# Altium PCB 0084 - AR Display Board Rev2.1.PcbDoc (part 1 of 3)
Units mm, origin at the board's own origin, x right, y up, seen from the top; angles counter-clockwise.
Board outline 127.7 x 27.2 mm, 4 copper layers (L1-TOP, L2-GND, L3-GND, L4-BOT), stack 1.571 mm thick; 141 components, 141 nets, 671 pads, 447 vias.
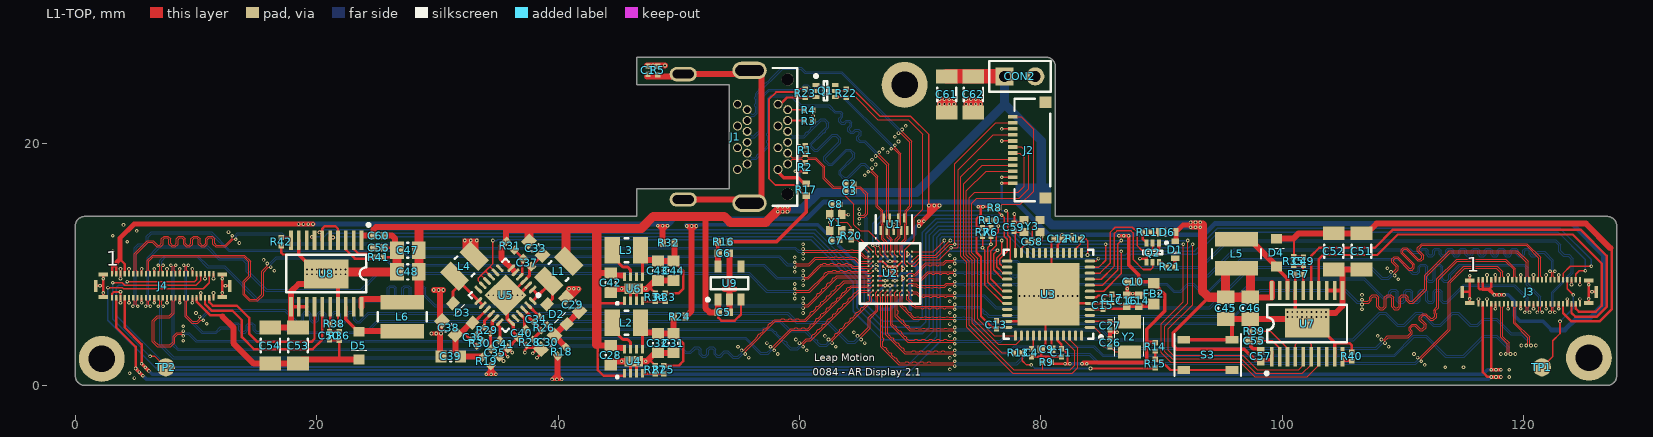
[diagram p0: L1-TOP view]
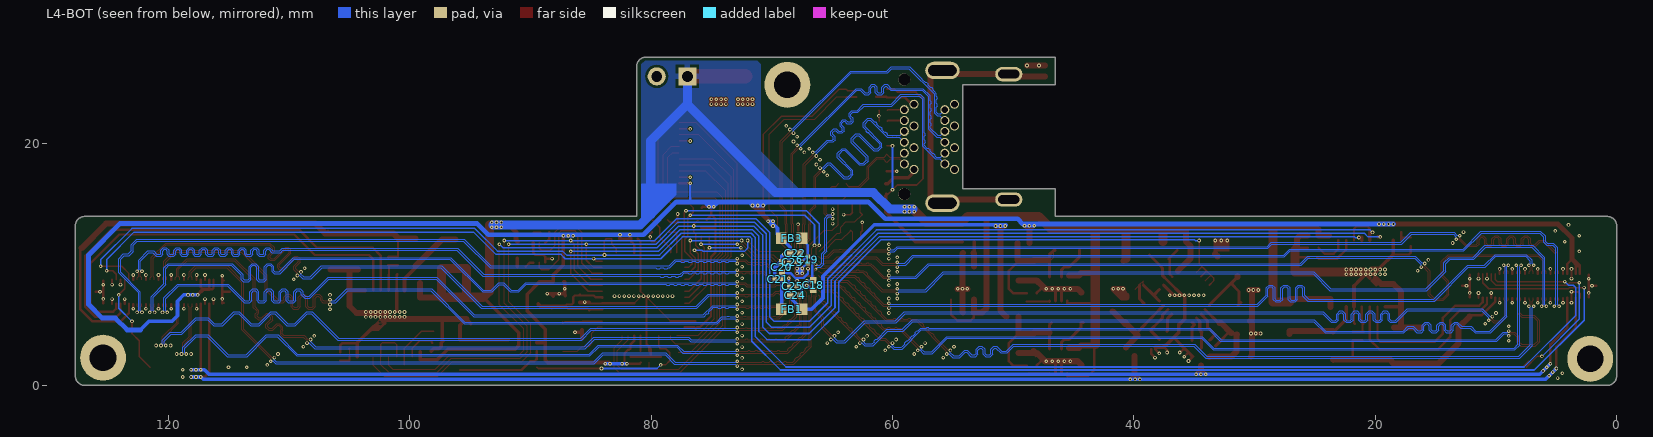
[diagram p1: L4-BOT view, seen from below]
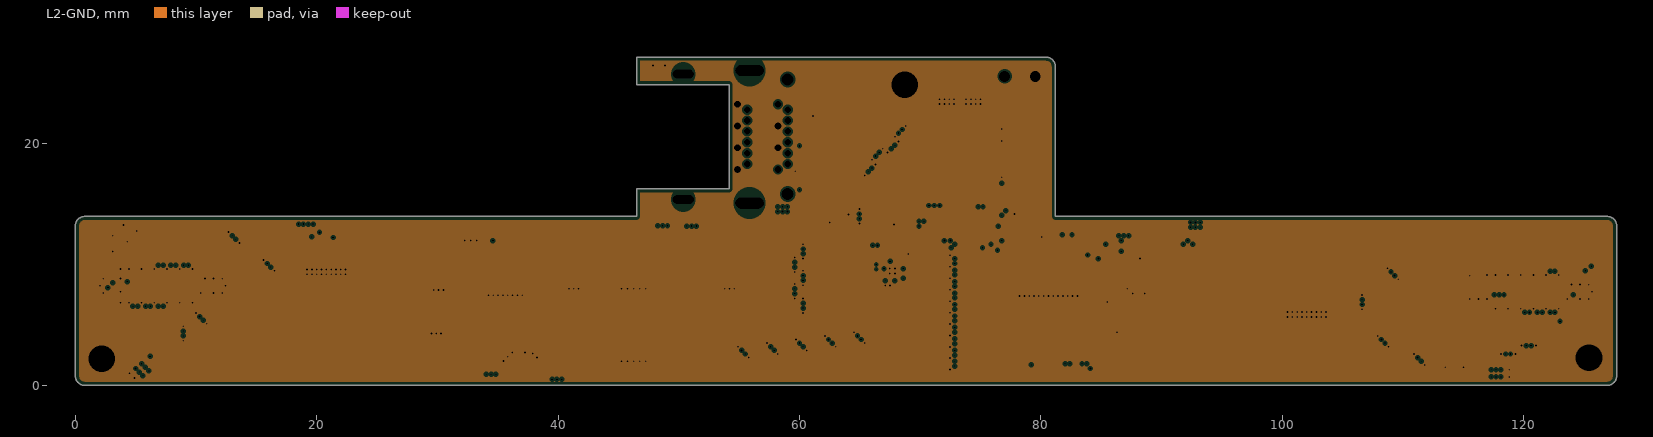
[diagram p2: L2-GND, clearances drawn from the general rule]
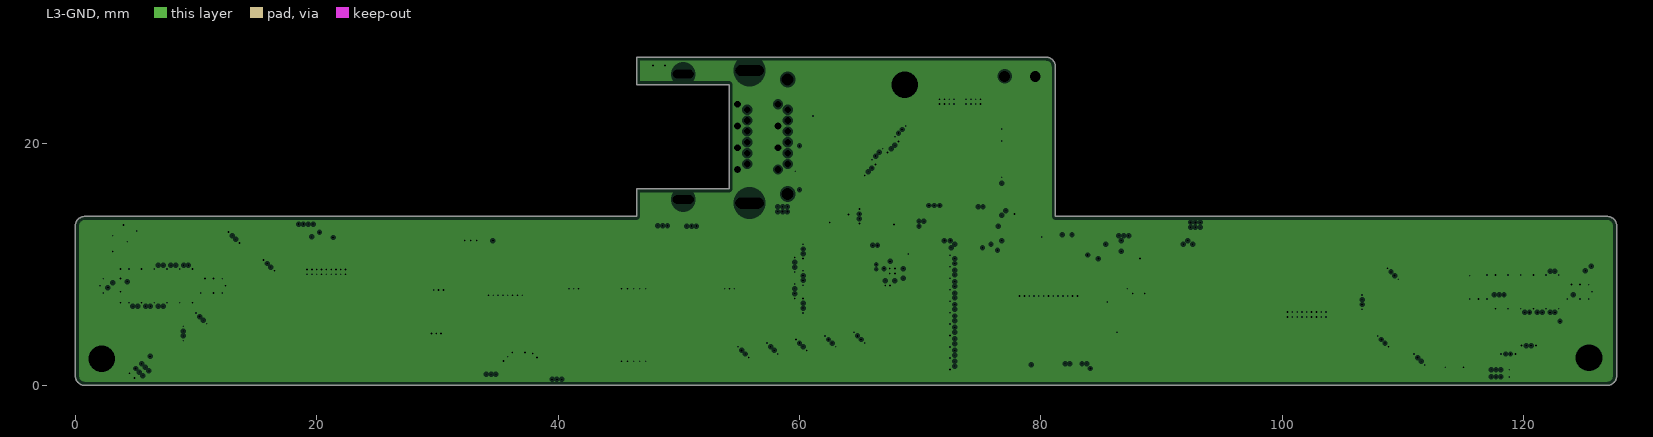
[diagram p3: L3-GND, clearances drawn from the general rule]

## Layer stack, top to bottom
Top Solder: solder mask 0.0102, Solder Resist, Dk 3.5
L1-TOP: signal copper 0.035
Dielectric1: core 0.175, FR-4, Dk 4.2
L2-GND: plane copper 0.036, net GND
Dielectric2: prepreg 1, Dk 4.2
L3-GND: plane copper 0.036, net GND
Dielectric 3: core 0.254, Dk 4.2
L4-BOT: signal copper 0.035
Bottom Solder: solder mask 0.0102, Solder Resist, Dk 3.5

## Board outline
0.8,0 cw(c0.8,0.8) 0,0.8 0,13.2 cw(c0.8,13.2) 0.8,14 46.5,14 46.5,16.3 54.16,16.3 54.16,24.9 46.5,24.9 46.5,27.2 80.4,27.2 cw(c80.4,26.4) 81.2,26.4 81.2,14 126.9,14 cw(c126.9,13.2) 127.7,13.2 127.7,0.8 cw(c126.9,0.8) 126.9,0

## Design rules (kind name [scope] priority, off if disabled: settings)
Clearance Clearance_1 [InComponent('CON2')] p1: gap=0.2
Clearance dp [(InDifferentialPairClass('All Differential Pairs')) vs InNet('GND')] p2: gap=0.076
Clearance [All] p3: gap=0.076
DiffPairsRouting [All] p1: maxlimit=0.076 minlimit=0.076 mostfreqgap=0.076 toplayer_minwidth=0.076 toplayer_maxwidth=0.076 toplayer_prefwidth=0.076 bottomlayer_minwidth=0.076 bottomlayer_maxwidth=0.076 bottomlayer_prefwidth=0.076 maxuncoupledlength=12.7
HoleSize [All] p1: absolutevalues=TRUE maxlimit=2.54 minlimit=0.1 maxpercent=80.000 minpercent=20.000
HoleToHoleClearance [All] p1: gap=0.25 allowstackedmicrovias=TRUE
MatchedLengths ML_MIPI_R [InNetClass('MIPI_R')] p1: tolerance=0.025 checknetsindiffpair=TRUE checkdiffpairvsdiffpair=TRUE checkothers=TRUE
MatchedLengths ML_MIPI_L [InNetClass('MIPI_L')] p2: tolerance=0.025 checknetsindiffpair=TRUE checkdiffpairvsdiffpair=TRUE checkothers=TRUE
MatchedLengths ML_DP_LANE [InNetClass('DP_LANE')] p3: tolerance=0.025 checknetsindiffpair=TRUE checkdiffpairvsdiffpair=TRUE checkothers=TRUE
MinimumAnnularRing [All] p1: minimumring=0.074
MinimumSolderMaskSliver [All] p1: minsoldermaskwidth=0.076
PlaneClearance [All] p1: clearance=0.15
PlaneConnect [All] p1: planeconnectstyle=Direct reliefexpansion=0 reliefentries=4 reliefconductorwidth=0.15 reliefairgap=0.15
PolygonConnect PolygonConnect_2 [InNet('GND') And OnLayer('L4-BOT')] p1: connectstyle=Relief reliefconductorwidth=0.254 reliefentries=4 polygonreliefangle="90 Angle" airgapwidth=0.254
PolygonConnect PolygonConnect_1 [InNet('5V') And OnLayer('L4-BOT')] p2: connectstyle=Relief reliefconductorwidth=0.5 reliefentries=4 polygonreliefangle="90 Angle" airgapwidth=0.2
PolygonConnect [All] p3: connectstyle=Direct reliefconductorwidth=0.254 reliefentries=4 polygonreliefangle="90 Angle" airgapwidth=0.254
RoutingVias [All] p1: holewidth=0.15 width=0.3 viastyle="Through Hole" minholewidth=0.15 minwidth=0.3 maxholewidth=0.711 maxwidth=1.27
SilkToSilkClearance [All] p1: silktosilkclearance=0.2
SilkToSolderMaskClearance SilkscreenOverComponentPads [IsPad] p1: minsilkscreentomaskgap=0.1 clearancetoexposedcopper=FALSE
SolderMaskExpansion [All] p1: expansion=0.025
UnpouredPolygon [All] p1: allowunpoured=FALSE
Width [All] p1: maxlimit=5 minlimit=0.076 preferedwidth=0.2 minimp=50.000000 maximp=50.000000 favimp=50.000000
21 further rules are at their usual default settings.

## Classes and differential pairs
component class "0084 - Connectors": C1 C61 C62 CON2 J1 J2 J3 J4 R1 R2 R3 R4 R5 R17 TP1 TP2 U1
component class "0084 - MCU": C2 C3 C4 C7 C8 C9 C10 C11 C12 C13 C14 C15 C16 C17 C18 C19 C20 C21 C22 C23 C24 C25 C26 C27 C58 C59 D1 D6 FB1 FB2 FB3 Q1 Q2 R6 R7 R8 R9 R10 R11 R12 R13 R14 R15 R20 R21 R22 R23 S3 U2 U3 Y1 Y2 Y3
component class "0084 - Power": C5 C6 C28 C29 C30 C31 C32 C33 C34 C35 C36 C37 C38 C39 C40 C41 C42 C43 C44 C45 C46 C47 C48 C49 C50 C51 C52 C53 C54 C55 C56 C57 C60 D2 D3 D4 D5 L1 L2 L3 L4 L5 L6 R16 R18 R19 R24 R25 R26 R27 R28 R29 R30 R31 R32 R33 R34 R35 R36 R37 R38 R39 R40 R41 R42 U4 U5 U6 U7 U8 U9
net class MIPI_R: MIPI_DSI10_0_N MIPI_DSI10_0_P MIPI_DSI10_1_N MIPI_DSI10_1_P MIPI_DSI10_2_N MIPI_DSI10_2_P MIPI_DSI10_3_N MIPI_DSI10_3_P MIPI_DSI10_C_N MIPI_DSI10_C_P MIPI_DSI11_0_N MIPI_DSI11_0_P MIPI_DSI11_1_N MIPI_DSI11_1_P MIPI_DSI11_2_N MIPI_DSI11_2_P MIPI_DSI11_3_N MIPI_DSI11_3_P MIPI_DSI11_C_N MIPI_DSI11_C_P
net class MIPI_L: MIPI_DSI00_0_N MIPI_DSI00_0_P MIPI_DSI00_1_N MIPI_DSI00_1_P MIPI_DSI00_2_N MIPI_DSI00_2_P MIPI_DSI00_3_N MIPI_DSI00_3_P MIPI_DSI00_C_N MIPI_DSI00_C_P MIPI_DSI01_0_N MIPI_DSI01_0_P MIPI_DSI01_1_N MIPI_DSI01_1_P MIPI_DSI01_2_N MIPI_DSI01_2_P MIPI_DSI01_3_N MIPI_DSI01_3_P MIPI_DSI01_C_N MIPI_DSI01_C_P
net class DP_LANE: DP_LANE0_N DP_LANE0_P DP_LANE1_N DP_LANE1_P DP_LANE2_N DP_LANE2_P DP_LANE3_N DP_LANE3_P
net class AUX: DP_AUX_CH_N DP_AUX_CH_P
differential pair AUX: +AUX_P -AUX_N
differential pair DP_AUX_CH: +DP_AUX_CH_P -DP_AUX_CH_N
differential pair DP_LANE0: +DP_LANE0_P -DP_LANE0_N
differential pair DP_LANE1: +DP_LANE1_P -DP_LANE1_N
differential pair DP_LANE2: +DP_LANE2_P -DP_LANE2_N
differential pair DP_LANE3: +DP_LANE3_P -DP_LANE3_N
differential pair MIPI_DSI00_0: +MIPI_DSI00_0_P -MIPI_DSI00_0_N
differential pair MIPI_DSI00_1: +MIPI_DSI00_1_P -MIPI_DSI00_1_N
differential pair MIPI_DSI00_2: +MIPI_DSI00_2_P -MIPI_DSI00_2_N
differential pair MIPI_DSI00_3: +MIPI_DSI00_3_P -MIPI_DSI00_3_N
differential pair MIPI_DSI00_C: +MIPI_DSI00_C_P -MIPI_DSI00_C_N
differential pair MIPI_DSI01_0: +MIPI_DSI01_0_P -MIPI_DSI01_0_N
differential pair MIPI_DSI01_1: +MIPI_DSI01_1_P -MIPI_DSI01_1_N
differential pair MIPI_DSI01_2: +MIPI_DSI01_2_P -MIPI_DSI01_2_N
differential pair MIPI_DSI01_3: +MIPI_DSI01_3_P -MIPI_DSI01_3_N
differential pair MIPI_DSI01_C: +MIPI_DSI01_C_P -MIPI_DSI01_C_N
differential pair MIPI_DSI10_0: +MIPI_DSI10_0_P -MIPI_DSI10_0_N
differential pair MIPI_DSI10_1: +MIPI_DSI10_1_P -MIPI_DSI10_1_N
differential pair MIPI_DSI10_2: +MIPI_DSI10_2_P -MIPI_DSI10_2_N
differential pair MIPI_DSI10_3: +MIPI_DSI10_3_P -MIPI_DSI10_3_N
differential pair MIPI_DSI10_C: +MIPI_DSI10_C_P -MIPI_DSI10_C_N
differential pair MIPI_DSI11_0: +MIPI_DSI11_0_P -MIPI_DSI11_0_N
differential pair MIPI_DSI11_1: +MIPI_DSI11_1_P -MIPI_DSI11_1_N
differential pair MIPI_DSI11_2: +MIPI_DSI11_2_P -MIPI_DSI11_2_N
differential pair MIPI_DSI11_3: +MIPI_DSI11_3_P -MIPI_DSI11_3_N
differential pair MIPI_DSI11_C: +MIPI_DSI11_C_P -MIPI_DSI11_C_N

## Components (designator, comment, footprint, x,y, rotation, side; value= is the part's Value field where it differs from the comment)
C1 "0.1uF" CAPC0201(0603)33_N 47.46,26.1 r270 top
C2 "0.1uF" CAPC0201(0603)33_N 64.16,16.7 r180 top
C3 "0.1uF" CAPC0201(0603)33_N 64.16,16.1 r180 top
C4 "0.1uF" CAPC0201(0603)33_N 79.2,2.7 r90 top
C5 "1.0uF" CAPC0402(1005)60_N 53.725,6.05 r0 top
C6 "1.0uF" CAPC0402(1005)60_N 53.725,10.95 r0 top
C7 "6pF" CAPC0201(0603)33_N 63,12 r180 top
C8 "6pF" CAPC0201(0603)33_N 63,15 r0 top
C9 "2.2uF" CAPC0402(1005)60_N 80.46,3 r180 top
C10 "1.0uF" CAPC0402(1005)60_N 87.66,8.6 r0 top
C11 "0.1uF" CAPC0201(0603)33_N 81.7,2.7 r90 top
C12 "0.1uF" CAPC0201(0603)33_N 81.425,12.15 r0 top
C13 "0.1uF" CAPC0201(0603)33_N 76.3,5.025 r270 top
C14 "1.0uF" CAPC0402(1005)60_N 88.1,7 r270 top
C15 "0.1uF" CAPC0201(0603)33_N 85.125,6.625 r270 top
C16 "1.0uF" CAPC0402(1005)60_N 87.1,7 r270 top
C17 "0.1uF" CAPC0201(0603)33_N 85.9,7.2 r90 top
C18 "1.0uF" CAPC0402(1005)60_L 66.56,8.3 r90 bottom
C19 "0.1uF" CAPC0201(0603)33_L 67.01,10.4 r90 bottom
C20 "1.0uF" CAPC0402(1005)60_L 69.16,9.8 r270 bottom
C21 "0.1uF" CAPC0201(0603)33_L 69.46,8.8 r180 bottom
C22 "1.0uF" CAPC0402(1005)60_L 68.06,10.95 r0 bottom
C23 "0.1uF" CAPC0201(0603)33_L 68.26,10.2 r0 bottom
C24 "1.0uF" CAPC0402(1005)60_L 68.06,7.45 r0 bottom
C25 "0.1uF" CAPC0201(0603)33_L 68.26,8.2 r0 bottom
C26 "18pF" CAPC0201(0603)33_N 85.725,3.55 r90 top
C27 "18pF" CAPC0201(0603)33_N 85.725,4.95 r270 top
C28 "10uF" CAPC0603(1608)100_N 44.36,2.5 r90 top
C29 "10uF" CAPC0603(1608)100_N 41.2,6.7 r315 top
C30 "10uF" CAPC0603(1608)100_N 39.144,3.567 r45 top
C31 "10uF" CAPC0603(1608)100_N 49.56,3.5 r90 top
C32 "10uF" CAPC0603(1608)100_N 48.26,3.5 r90 top
C33 "10uF" CAPC0603(1608)100_N 38.144,11.367 r135 top
C34 "15pF" CAPC0201(0603)33_N 38.19,5.487 r225 top
C35 "1.0uF" CAPC0402(1005)60_N 34.8,2.7 r315 top
C36 "12pF" CAPC0201(0603)33_N 33,4 r45 top
C37 "1.0uF" CAPC0402(1005)60_N 37.444,10.167 r135 top
C38 "10uF" CAPC0603(1608)100_N 30.944,4.767 r315 top
C39 "10uF" CAPC0603(1608)100_N 31.1,2.4 r0 top
C40 "10nF" CAPC0402(1005)60_N 37,4.3 r225 top
C41 "4.7nF" CAPC0402(1005)60_N 35.5,3.4 r315 top
C42 "10uF" CAPC0603(1608)100_N 44.36,8.5 r90 top
C43 "10uF" CAPC0603(1608)100_N 48.26,9.5 r90 top
C44 "10uF" CAPC0603(1608)100_N 49.56,9.5 r90 top
C45 "47uF" CAPC0805(2012)100_N 95.3,6.4 r90 top
C46 "47uF" CAPC0805(2012)100_N 97.35,6.4 r90 top
C47 "47uF" CAPC0805(2012)100_N 27.56,11.2 r0 top
C48 "47uF" CAPC0805(2012)100_N 27.56,9.4 r0 top
C49 "18pF" CAPC0201(0603)33_N 101.76,10.3 r270 top
C50 "18pF" CAPC0201(0603)33_N 21.06,4.1 r90 top
C51 "10uF" CAPC1206(3216)170_N 106.56,11.1 r90 top
C52 "10uF" CAPC1206(3216)170_N 104.26,11.1 r90 top
C53 "10uF" CAPC1206(3216)170_N 18.46,3.3 r270 top
C54 "10uF" CAPC1206(3216)170_N 16.16,3.3 r270 top
C55 "1.0uF" CAPC0402(1005)60_N 97.66,3.7 r180 top
C56 "1.0uF" CAPC0402(1005)60_N 25.16,11.4 r0 top
C57 "1.0uF" CAPC0402(1005)60_N 98.2,2.4 r270 top
C58 "12pF" CAPC0201(0603)33_N 79.26,11.9 r0 top
C59 "12pF" CAPC0201(0603)33_N 77.76,13.1 r90 top
C60 "1.0uF" CAPC0402(1005)60_N 25.16,12.4 r180 top
C61 "10uF" CAPC1206(3216)170_N 72.2,24.1 r90 top
C62 "10uF" CAPC1206(3216)170_N 74.4,24.1 r90 top
CON2 "CON2" CON2_100mil 78.26,25.6 r0 top
D1 "Value" Dialight_598-8010-107F 91.132,11.225 r270 top
D2 "SCHOTTKY" Toshiba_CUS10S40,H3F#1 39.9,5.9 r315 top
D3 "SCHOTTKY" Toshiba_CUS10S40,H3F#2 32.1,6 r315 top
D4 "SCHOTTKY" Toshiba_CUS10S40,H3F#2 99.5,11 r270 top
D5 "SCHOTTKY" Toshiba_CUS10S40,H3F#2 23.5,3.3 r90 top
D6 "Value" Dialight_598-8040-107F 90.475,12.7 r180 top
FB1 "Ferrite Bead" INDC1608X09N 68.36,6.3 r0 bottom
FB2 "Ferrite Bead" INDC1608X09N 89.36,7.6 r270 top
FB3 "Ferrite Bead" INDC1608X09N 68.36,12.2 r180 bottom
J1 "TE_2129320-3" TE_2129320-3 53.26,20.59 r270 top
J2 "FCI 10051922-1210ELF" "FCI 10051922-1210ELF" 79.51,19.5 r90 top locked
J3 "Kyocera_245863050024829" Kyocera_245863050024829 120.45,7.75 r0 top (schematic designator J2)
J4 "Kyocera_245863050024829" Kyocera_245863050024829 7.25,8.25 r0 top (schematic designator J2)
L1 "4.7uH" INDC2520X10N 40.044,9.467 r225 top
L2 "1uH" INDC2520X10N 45.66,5.2 r0 top
L3 "1uH" INDC2520X10N 45.66,11.2 r0 top
L4 "4.7uH" INDC2520X10N 32.244,9.867 r45 top
L5 "15uH" Coilcraft_XAL4040-153MEB 96.2,10.9 r90 top
L6 "15uH" Coilcraft_XAL4040-153MEB 27.1,5.7 r270 top
Q1 "NFET_DUAL" SOT-563 62.16,24.4 r0 top
Q2 "NFET_DUAL" SOT-563 89.26,11 r270 top
R1 "1M" RESC0201(0603)_N#1 60.46,19.49 r90 top
R2 "1M" RESC0201(0603)_N#2 60.46,18.09 r270 top
R3 "1M" RESC0201(0603)_N#1 60.76,21.9 r180 top
R4 "1M" RESC0201(0603)_N#1 60.76,22.8 r180 top
R5 "1M" RESC0201(0603)_N#1 48.26,26.1 r270 top
R6 "4.7K" RESC0201(0603)_N#1 75.86,12.7 r90 top
R7 "4.7K" RESC0201(0603)_N#1 75.16,12.7 r90 top
R8 "10K" RESC0201(0603)_N#1 76.16,14.7 r180 top
R9 "10K" RESC0201(0603)_N#1 80.5,1.9 r0 top
R10 "10K" RESC0201(0603)_N#1 75.76,13.7 r180 top
R11 "1K" RESC0201(0603)_N#1 88.8,12.675 r180 top
R12 "10K" RESC0201(0603)_N#1 82.925,12.15 r180 top
R13 "1K" RESC0201(0603)_N#1 78.1,2.7 r0 top
R14 "10K" RESC0201(0603)_N#1 89.46,3.2 r90 top
R15 "1K" RESC0201(0603)_N#1 89.46,1.8 r270 top
R16 "0R" RESC0402(1005)_N 53.725,11.89 r0 top
R17 "0R" RESC0402(1005)_N 60.56,16.2 r270 top
R18 "0R" RESC0402(1005)_N 40.3,2.8 r225 top
R19 "0R" RESC0402(1005)_N 34.1,2 r315 top
R20 "1M" RESC0201(0603)_N#1 64.3,12.4 r270 top
R21 "1K" RESC0201(0603)_N#1 90.725,9.825 r180 top
R22 "10K" RESC0201(0603)_N#1 63.86,24.2 r90 top
R23 "10K" RESC0201(0603)_N#1 60.46,24.2 r270 top
R24 "0R" RESC0402(1005)_N 50.06,5.7 r0 top
R25 "36.5K" RESC0201(0603)_N#1 48.76,1.3 r90 top
R26 "560K" RESC0201(0603)_N#1 38.844,4.767 r225 top
R27 "30K" RESC0201(0603)_N#1 48.06,1.3 r270 top
R28 "150K" RESC0201(0603)_N#1 37.644,3.567 r45 top
R29 "715K" RESC0201(0603)_N#1 34.144,4.567 r135 top
R30 "620K" RESC0201(0603)_N#1 33.5,3.5 r45 top
R31 "10R" RESC0402(1005)_N 36.044,11.567 r315 top
R32 "0R" RESC0402(1005)_N 49.16,11.8 r180 top
R33 "90.9K" RESC0201(0603)_N#1 48.86,7.3 r90 top
R34 "30K" RESC0201(0603)_N#1 48.06,7.3 r270 top
R35 "750K" RESC0201(0603)_N#1 100.96,10.3 r270 top
R36 "750K" RESC0201(0603)_N#1 21.86,4.1 r90 top
R37 "130K" RESC0201(0603)_N#1 101.36,9.2 r0 top
R38 "130K" RESC0201(0603)_N#1 21.46,5.1 r180 top
R39 "49.9K" RESC0201(0603)_N#1 97.66,4.5 r0 top
R40 "62K" RESC0201(0603)_N#1 105.76,2.4 r270 top
R41 "49.9K" RESC0201(0603)_N#1 25.16,10.6 r180 top
R42 "62K" RESC0201(0603)_N#1 17.06,11.9 r90 top
S3 "SW-SPST" ALPS_SKRPABE010 93.825,2.525 r0 top
TP1 "TestPoint" TestPointRnd-1_5mm#1 121.5,1.5 r0 top
TP2 "TestPoint" TestPointRnd-1_5mm#2 7.9,1.5 r90 top
U1 "Semtech_RCLAMP7528T.TNT" Semtech_RCLAMP7528T.TNT 67.82,13.35 r90 top locked
U2 "Analogix_ANX7350" Analogix_ANX7350 67.5,9.275 r0 top
U3 "Atmel_ATSAMD21G18A-MU" Atmel_ATSAMD21G18A-MU 80.625,7.55 r0 top
U4 "TI_TLV62080" TI_TLV62080 46.26,2 r90 top
U5 "TI_TPS65131-Q1" TI_TPS65131-Q1 35.644,7.467 r225 top
U6 "TI_TLV62080" TI_TLV62080 46.26,8 r90 top
U7 "TI_TPS61194-Q1" TI_TPS61194-Q1 102.072,5.15 r0 top
U8 "TI_TPS61194-Q1" TI_TPS61194-Q1 20.775,9.231 r180 top
U9 "TI_LP5907_SOT23" TI_LP5907_SOT23 54.2,8.475 r90 top
Y1 "Crystal" Abracon_ABM11 63,13.5 r270 top
Y2 "Crystal_2pin" Abracon_ABS07 87.325,4.025 r270 top
Y3 "Crystal" Abracon_ABM11 79.26,13.2 r0 top

## Footprints (in the part's own frame and the unit in brackets; to place one, negate y for a bottom-side part, rotate by r counter-clockwise, add the part's x,y. Pads: shape width x height; smd on the part's side, far side on the other; paste and mask are expansions set on the pad)
Abracon_ABM11 [mm]
  rect 0.75x0.65 smd: 1(-0.65,-0.5) 2(0.65,-0.5) 3(0.65,0.5) 4(-0.65,0.5)
  body extent -1,-0.8 1,0.8, height 0.59
Abracon_ABS07 [mm]
  rect 1.1x1.9 smd: 0(-1.25,0) 1(1.25,0)
  silkscreen extent -1.6,-1.2 1.6,1.2, body extent -1.6,-0.75 1.6,0.75, height 0.9
ALPS_SKRPABE010 [mm]
  rect 1.05x0.65 smd: 1(-2,1.25) 1(2,1.25) 2(-2,-1.25) 2(2,-1.25)
  silkscreen extent -2.75,-1.75 2.75,1.75, body extent -2.3,-1.6 2.3,1.6, height 2.5
Analogix_ANX7350 [mm] "BGA, 100-Leads, Body 5.00x5.00mmx0.91mm, Pitch 0.40mm"
  round 0.171 smd: A1(-1.8,1.8) A2(-1.4,1.8) A3(-1,1.8) A4(-0.6,1.8) A5(-0.2,1.8) A6(0.2,1.8) A7(0.6,1.8) A8(1,1.8) A9(1.4,1.8) A10(1.8,1.8) B1(-1.8,1.4) B2(-1.4,1.4) B3(-1,1.4) B4(-0.6,1.4) B5(-0.2,1.4) B6(0.2,1.4) B7(0.6,1.4) B8(1,1.4) B9(1.4,1.4) B10(1.8,1.4) C1(-1.8,1) C2(-1.4,1) C3(-1,1) C4(-0.6,1) C5(-0.2,1) C6(0.2,1) C7(0.6,1) C8(1,1) C9(1.4,1) C10(1.8,1) D1(-1.8,0.6) D2(-1.4,0.6) D3(-1,0.6) D4(-0.6,0.6) D5(-0.2,0.6) D6(0.2,0.6) D7(0.6,0.6) D8(1,0.6) D9(1.4,0.6) D10(1.8,0.6) E1(-1.8,0.2) E2(-1.4,0.2) E3(-1,0.2) E4(-0.6,0.2) E5(-0.2,0.2) E6(0.2,0.2) E7(0.6,0.2) E8(1,0.2) E9(1.4,0.2) E10(1.8,0.2) F1(-1.8,-0.2) F2(-1.4,-0.2) F3(-1,-0.2) F4(-0.6,-0.2) F5(-0.2,-0.2) F6(0.2,-0.2) F7(0.6,-0.2) F8(1,-0.2) F9(1.4,-0.2) F10(1.8,-0.2) G1(-1.8,-0.6) G2(-1.4,-0.6) G3(-1,-0.6) G4(-0.6,-0.6) G5(-0.2,-0.6) G6(0.2,-0.6) G7(0.6,-0.6) G8(1,-0.6) G9(1.4,-0.6) G10(1.8,-0.6) H1(-1.8,-1) H2(-1.4,-1) H3(-1,-1) H4(-0.6,-1) H5(-0.2,-1) H6(0.2,-1) H7(0.6,-1) H8(1,-1) H9(1.4,-1) H10(1.8,-1) J1(-1.8,-1.4) J2(-1.4,-1.4) J3(-1,-1.4) J4(-0.6,-1.4) J5(-0.2,-1.4) J6(0.2,-1.4) J7(0.6,-1.4) J8(1,-1.4) J9(1.4,-1.4) J10(1.8,-1.4) K1(-1.8,-1.8) K2(-1.4,-1.8) K3(-1,-1.8) K4(-0.6,-1.8) K5(-0.2,-1.8) K6(0.2,-1.8) K7(0.6,-1.8) K8(1,-1.8) K9(1.4,-1.8) K10(1.8,-1.8)
  silkscreen extent -2.5,-2.5 2.5,2.5, body extent -2.5,-2.5 2.5,2.5, height 0.91
Atmel_ATSAMD21G18A-MU [mm]
  oval 0.85x0.25 smd: 1(3.425,-2.75) 2(3.425,-2.25) 3(3.425,-1.75) 4(3.425,-1.25) 5(3.425,-0.75) 6(3.425,-0.25) 7(3.425,0.25) 8(3.425,0.75) 9(3.425,1.25) 10(3.425,1.75) 11(3.425,2.25) 12(3.425,2.75) 25(-3.425,2.75) 26(-3.425,2.25) 27(-3.425,1.75) 28(-3.425,1.25) 29(-3.425,0.75) 30(-3.425,0.25) 31(-3.425,-0.25) 32(-3.425,-0.75) 33(-3.425,-1.25) 34(-3.425,-1.75) 35(-3.425,-2.25) 36(-3.425,-2.75)
  oval 0.25x0.85 smd: 13(2.75,3.425) 14(2.25,3.425) 15(1.75,3.425) 16(1.25,3.425) 17(0.75,3.425) 18(0.25,3.425) 19(-0.25,3.425) 20(-0.75,3.425) 21(-1.25,3.425) 22(-1.75,3.425) 23(-2.25,3.425) 24(-2.75,3.425) 37(-2.75,-3.425) 38(-2.25,-3.425) 39(-1.75,-3.425) 40(-1.25,-3.425) 41(-0.75,-3.425) 42(-0.25,-3.425) 43(0.25,-3.425) 44(0.75,-3.425) 45(1.25,-3.425) 46(1.75,-3.425) 47(2.25,-3.425) 48(2.75,-3.425)
  rect 5.15x5.15 smd: 49(0,0)
  silkscreen extent -3.7,-3.7 4.47,3.7, body extent -3.55,-3.55 3.55,3.55, height 0.9
CAPC0201(0603)33_L [mm] "Chip Capacitor, Body 0.6x0.3mm, Height 0.33mm, IPC High Density"
  rect 0.36x0.32 smd: 1(-0.28,0) 2(0.28,0)
  body extent -0.32,-0.17 0.32,0.17, height 0.33
CAPC0201(0603)33_N [mm] "Chip Capacitor, Body 0.6x0.3mm, Height 0.33mm, IPC Medium Density"
  rect 0.46x0.42 smd: 1(-0.33,0) 2(0.33,0)
  body extent -0.31,-0.16 0.32,0.17, height 0.33
CAPC0402(1005)60_L [mm] "Chip Capacitor, Body 1.0x0.5mm, Height 0.6mm, IPC High Density"
  rect 0.52x0.52 smd: 1(-0.4,0) 2(0.4,0)
  body extent -0.55,-0.3 0.55,0.3, height 0.6
CAPC0402(1005)60_N [mm] "Chip Capacitor, Body 1.0x0.5mm, Height 0.6mm, IPC Medium Density"
  rect 0.62x0.62 smd: 1(-0.45,0) 2(0.45,0)
  body extent -0.55,-0.3 0.55,0.3, height 0.6
CAPC0603(1608)100_N [mm] "Chip Capacitor, Body 1.6x0.8mm, Height 1.0mm, IPC Medium Density"
  rect 0.9x1 smd: 1(-0.8,0) 2(0.8,0)
  silkscreen extent -0.05,-0.4 0.05,0.4, body extent -0.87,-0.48 0.88,0.47, height 1
CAPC0805(2012)100_N [mm] "Chip Capacitor, Body 2.0x1.2mm, Height 1.0mm, IPC Medium Density"
  rect 1.15x1.45 smd: 1(-0.9,0) 2(0.9,0)
  silkscreen extent -0.05,-0.62 0.05,0.63, body extent -1.1,-0.72 1.1,0.73, height 1
CAPC1206(3216)170_N [mm] "Chip Capacitor, Body 3.2x1.6mm, Height 1.7mm, IPC Medium Density"
  rect 1.15x1.8 smd: 1(-1.5,0) 2(1.5,0)
  silkscreen extent -0.55,-0.8 0.55,0.8, body extent -1.7,-0.9 1.7,0.9, height 1.7
Coilcraft_XAL4040-153MEB [mm] "Chip Inductor, 2-Leads, Body 4.00x4.00mm, IPC Medium Density"
  rect 1.2x3.6 smd: 1(-1.2,0) 2(1.2,0)
  silkscreen extent -0.38,-2.03 0.38,2.03, body extent -2.1,-2.1 2.1,2.1, height 4.1
CON2_100mil [mm]
  rect 1.5x1.5 hole 0.9: 1(-1.27,0)
  round 1.5 hole 0.9: 2(1.27,0)
  silkscreen extent -2.54,-1.27 2.54,1.27
Dialight_598-8010-107F [mm]
  rect 0.45x0.65 smd: A(-0.7,0)
  rect 0.45x0.7 smd: K(0.7,0)
  body extent -0.81,-0.4 0.81,0.39, height 0.71
Dialight_598-8040-107F [mm]
  rect 0.45x0.65 smd: A(-0.7,0)
  rect 0.45x0.7 smd: K(0.7,0)
  body extent -0.81,-0.4 0.81,0.39, height 0.71
"FCI 10051922-1210ELF" [mm]
  rect 0.95x1 smd: 0(-3.975,-0.85) 0(3.975,-0.85)
  rect 0.3x0.8 smd: 1(-2.75,1.85) 2(-2.25,1.85) 3(-1.75,1.85) 4(-1.25,1.85) 5(-0.75,1.85) 6(-0.25,1.85) 7(0.25,1.85) 8(0.75,1.85) 9(1.25,1.85) 10(1.75,1.85) 11(2.25,1.85) 12(2.75,1.85)
  silkscreen extent -4.25,-1.25 4.25,1.7, body extent -4.25,-1.75 4.25,2, height 1.27
INDC1608X09N [mm] "Chip Inductor, 2-Leads, Body 1.60x0.80mm, IPC Medium Density"
  rect 0.89x0.96 smd: 1(-0.855,0) 2(0.855,0)
  body extent -0.87,-0.48 0.87,0.47, height 0.95
INDC2520X10N [mm] "Chip Inductor, 2-Leads, Body 2.50x2.00mm, IPC Medium Density"
  rect 1.27x2.2 smd: 1(-1.165,0) 2(1.165,0)
  silkscreen extent -0.15,-1 0.15,1, body extent -1.35,-1.1 1.35,1.1, height 1
Kyocera_245863050024829 [mm] "50 pin female connector 0.35mm pitch"
  rect 0.18x0.47 smd: 1(-4.2,-1) 2(-4.2,1) 3(-3.85,-1) 4(-3.85,1) 5(-3.5,-1) 6(-3.5,1) 7(-3.15,-1) 8(-3.15,1) 9(-2.8,-1) 10(-2.8,1) 11(-2.45,-1) 12(-2.45,1) 13(-2.1,-1) 14(-2.1,1) 15(-1.75,-1) 16(-1.75,1) 17(-1.4,-1) 18(-1.4,1) 19(-1.05,-1) 20(-1.05,1) 21(-0.7,-1) 22(-0.7,1) 23(-0.35,-1) 24(-0.35,1) 25(0,-1) 26(0,1) 27(0.35,-1) 28(0.35,1) 29(0.7,-1) 30(0.7,1) 31(1.05,-1) 32(1.05,1) 33(1.4,-1) 34(1.4,1) 35(1.75,-1) 36(1.75,1) 37(2.1,-1) 38(2.1,1) 39(2.45,-1) 40(2.45,1) 41(2.8,-1) 42(2.8,1) 43(3.15,-1) 44(3.15,1) 45(3.5,-1) 46(3.5,1) 47(3.85,-1) 48(3.85,1) 49(4.2,-1) 50(4.2,1)
  rect 0.3x1 smd: M(-5.55,0) M(5.55,0)
  rect 0.8x0.35 smd: M(-4.925,-0.935) M(-4.925,0.935) M(4.925,-0.935) M(4.925,0.935)
RESC0201(0603)_N#1 [mm] "Chip Resistor, Body 0.6x0.3mm, IPC Medium Density"
  rect 0.45x0.45 smd: 1(-0.35,0) 2(0.35,0)
  body extent -0.31,-0.16 0.31,0.16, height 0.3
RESC0201(0603)_N#2 [mm] "Chip Resistor, Body 0.6x0.3mm, IPC Medium Density"
  rect 0.45x0.45 smd: 1(0.35,0) 2(-0.35,0)
  body extent -0.31,-0.16 0.31,0.16, height 0.3
RESC0402(1005)_N [mm] "Chip Resistor, Body 1.0x0.5mm, IPC Medium Density"
  rect 0.55x0.65 smd: 1(-0.5,0) 2(0.5,0)
  body extent -0.52,-0.27 0.53,0.28, height 0.4
Semtech_RCLAMP7528T.TNT [mm] "SON, 10-Leads, Body 2.60x1.10mm, Pitch 0.50mm, IPC Medium Density"
  rect 0.75x0.2 smd mask+0: 1(-0.52,1.1) 2(-0.52,0.6) 3(-0.52,0) 4(-0.52,-0.6) 5(-0.52,-1.1) 6(0.52,-0.85) 7(0.52,-0.35) 8(0.52,0.35) 9(0.52,0.85)
  silkscreen extent -1.2,-1.5 0.75,1.55, body extent -0.6,-1.35 0.6,1.35, height 0.43
SOT-563 [mm] "SOTFL, 6-Leads, Body 1.60x1.60mm, Pitch 0.50mm, IPC Medium Density"
  rect 0.55x0.33 smd: 1(-0.8,0.5) 2(-0.8,0) 3(-0.8,-0.5) 4(0.8,-0.5) 5(0.8,0) 6(0.8,0.5)
  silkscreen extent -0.92,-0.8 0.15,1.35, body extent -0.6,-0.8 0.6,0.8, height 0.5
TE_2129320-3 [mm] "Mini Displayport"
  oval 1.45x2.85 hole 0.9 slot 2.35 at 90 deg: 0(-5.5,2.605) 0(5.49,2.605)
  oval 1.2x2.25 hole 0.7 slot 1.74 at 90 deg: 0(-5.2,-2.895) 0(5.19,-2.895)
  round 0.75 hole 0.55: 1(-2.7,1.605) 2(-2.7,4.955) 3(-2.25,2.405) 4(-2.25,5.755) 5(-1.35,2.405) 6(-1.35,5.755) 7(-0.9,1.605) 8(-0.9,4.955) 9(-0.45,2.405) 10(-0.45,5.755) 11(0.45,2.405) 12(0.45,5.755) 13(0.9,1.605) 14(0.9,4.955) 15(1.35,2.405) 16(1.35,5.755) 17(2.25,2.405) 18(2.25,5.755) 19(2.7,1.605) 20(2.7,4.955)
  round 1 hole 1 unplated: ""(-4.75,5.755) ""(4.74,5.755)
  silkscreen extent -5.7,4.5 5.7,6.56, body extent -5.67,-6.34 5.73,6.31, height 4.23
TestPointRnd-1_5mm#1 [mm]
  round 1.5 smd paste-1: 0(0,0)
TestPointRnd-1_5mm#2 [mm]
  round 1.5 smd paste-1: 0(0,0.4)
TI_LP5907_SOT23 [mm] "SOT23, 5-Leads, Body 2.90x2.80mm, Pitch 0.95mm, IPC Medium Density"
  rect 1x0.6 smd: 1(-1.375,0.95) 2(-1.375,0) 3(-1.375,-0.95) 4(1.375,-0.95) 5(1.375,0.95)
  silkscreen extent -1.5,-1.55 0.5,1.92, body extent -0.88,-1.52 0.87,1.53, height 1.45
TI_TLV62080 [mm] "SON, 8-Leads, Body 2.00x2.00mm, Pitch 0.50mm, Thermal Pad 1.55x0.85mm, IPC Medium Density"
  rect 0.7x0.25 smd: 1(-0.995,0.75) 2(-0.995,0.25) 3(-0.995,-0.25) 4(-0.995,-0.75) 5(0.995,-0.75) 6(0.995,-0.25) 7(0.995,0.25) 8(0.995,0.75)
  rect 0.85x1.55 smd: 9(0,0)
  silkscreen extent -1.4,1.26 -1.2,1.46, body extent -1.05,-1.05 1.05,1.05, height 0.8
TI_TPS61194-Q1 [mm] "20 TSSOP WITH P.PAD"
  rect 0.3x1.6 smd: 1(-2.943,-2.785) 2(-2.293,-2.785) 3(-1.643,-2.785) 4(-0.993,-2.785) 5(-0.343,-2.785) 6(0.307,-2.785) 7(0.957,-2.785) 8(1.607,-2.785) 9(2.257,-2.785) 10(2.907,-2.785) 11(2.907,2.715) 12(2.257,2.715) 13(1.607,2.715) 14(0.957,2.715) 15(0.307,2.715) 16(-0.343,2.715) 17(-0.993,2.715) 18(-1.643,2.715) 19(-2.293,2.715) 20(-2.943,2.715)
  rect 3.7x2.4 smd: 21(-0.022,0.009)
  silkscreen extent -3.5,-4.27 3.28,1.52, body extent -3.3,-1.52 3.3,1.52, height 1.1
TI_TPS65131-Q1 [mm]
  oval 0.8x0.25 smd: 1(-1.925,1.25) 2(-1.925,0.75) 3(-1.925,0.25) 4(-1.925,-0.25) 5(-1.925,-0.75) 6(-1.925,-1.25) 13(1.925,-1.25) 14(1.925,-0.75) 15(1.925,-0.25) 16(1.925,0.25) 17(1.925,0.75) 18(1.925,1.25)
  oval 0.25x0.8 smd: 7(-1.25,-1.925) 8(-0.75,-1.925) 9(-0.25,-1.925) 10(0.25,-1.925) 11(0.75,-1.925) 12(1.25,-1.925) 19(1.25,1.925) 20(0.75,1.925) 21(0.25,1.925) 22(-0.25,1.925) 23(-0.75,1.925) 24(-1.25,1.925)
  rect 2.45x2.45 smd: 25(0,0)
  silkscreen extent -2.15,-2.15 2.15,2.15, body extent -2,-2 2,2, height 1
Toshiba_CUS10S40,H3F#1 [mm] "SODFL, 2-Leads, Body 1.25x2.50mm, IPC Medium Density"
  rect 0.8x0.9 smd: A(-1.15,0) K(1.15,0)
  silkscreen extent 0.38,-0.64 0.38,0.64, body extent -0.9,-0.67 0.9,0.67, height 1
Toshiba_CUS10S40,H3F#2 [mm] "SODFL, 2-Leads, Body 1.25x2.50mm, IPC Medium Density"
  rect 0.8x0.9 smd: A(1.15,0) K(-1.15,0)
  silkscreen extent -0.38,-0.64 -0.38,0.63, body extent -0.9,-0.67 0.9,0.67, height 1

## Part data
C1 C2 C3 C4 C11 C12 C13 C15 C17 C19 C21 C23 C25: library part CAP_0060, "Capacitor, 0.1uF, 10V, 10%, 0201, Ceramic, X5R"
C5 C6 C10 C14 C16 C18 C20 C22 C24 C35 C37 C40 C41 C55 C56 C57 C60: library part CAP_0023, "Capacitor, 1.0uF, 10V, 10%, 0402, Ceramic, X5R"
C7 C8: library part CAP_0064, "Capacitor, 6pF, 50V, 0.1pF, 0201, Ceramic, C0G(NP0)"
C9: library part CAP_0016, "Capacitor, 2.2uF, 6.3V, 20%, 0402, Ceramic, X5R"
C26 C27 C49 C50: library part CAP_0066, "Capacitor, 18pF, 50V, 2%, 0201, Ceramic, C0G(NP0)"
C28 C29 C30 C31 C32 C33 C38 C39 C42 C43 C44: library part CAP_0069, "Capacitor, 10uF, 10V, 10%, 0603, Ceramic, X5R"
C34: library part CAP_0067, "Capacitor, 15pF, 50V, 2%, 0201, Ceramic, C0G(NP0)"
C36 C58 C59: library part CAP_0065, "Capacitor, 12pF, 50V, 2%, 0201, Ceramic, C0G(NP0)"
C45 C46 C47 C48: library part CAP_0050, "Capacitor, 47uF, 10V, 20%, 0805, Ceramic, X5R"
C51 C52 C53 C54 C61 C62: library part CAP_0068, "Capacitor, 10uF, 50V, 10%, 1206, Ceramic, X7R"
CON2: library part CONN_0036, "Connector, Generic, Header, 2POS, 2.54mm"
D1: library part LED_0017, "LED, 635nm, 140deg, , 20mA, , 1.6mm x 0.8mm, -30C - 85C"
D2 D3 D4 D5: library part DIODE_0020, "Diode, -40C - 150C, SOD-323"
D6: library part LED_0034, "LED, 593nm, 140deg, , 20mA, , 1.6mm x 0.8mm, -30C - 85C"
FB1 FB2 FB3: library part FB_0001, "FERRITE CHIP BEAD 600 OHM SMD"
J1: library part CONN_0094, "Connector, TE Connectivity, Receptacle, 20POS, 0.9mm"
J2: library part CONN_0043, "Connector, FCI, Right Angle, 12POS, 0.5mm"
J3 J4: "245863050024829"
L1 L4: library part IND_0023, "FIXED IND 4.7UH 1.4A 216 MOHM"
L2 L3: library part IND_0001, "INDUCTOR 1.0UH 20% 1600MA 1008"
L5 L6: library part IND_0026, "Fixed Inductors XAL4040 AEC-Q200 15 uH 20 % 2.8 A"
Q1 Q2: library part NFET_0009, "Transistor, NFET_DUAL, 2.2Ohm, 200mA, 120mW, 	SOT-563, -55C - 150C"
R1 R2 R3 R4 R5 R20: library part RES_0178, "Resistor, 1M, 1/20W, 1%, 0201"
R6 R7: library part RES_0040, "Resistor, 4.7K, 1/20W, 1%, 0201"
R8 R9 R10 R12 R14 R22 R23: library part RES_0014, "Resistor, 10K, 1/20W, 5%, 0201"
R11 R13 R15 R21: library part RES_0036, "Resistor, 1K, 1/20W, 5%, 0201"
R16 R17 R18 R19 R24 R32: library part RES_0006, "Resistor, 0R, 1/10W, Jumper, 0402"
R25: library part RES_0176, "Resistor, 36.5K, 1/20W, 1%, 0201"
R26: library part RES_0194, "Resistor, 560K, 1/20W, 1%, 0201"
R27 R34: library part RES_0175, "Resistor, 30K, 1/20W, 1%, 0201"
R28: library part RES_0173, "Resistor, 150K, 1/20W, 1%, 0201"
R29: library part RES_0195, "Resistor, 715K, 1/20W, 1%, 0201"
R30: library part RES_0174, "Resistor, 620K, 1/20W, 1%, 0201"
R31: library part RES_0094, "Resistor, 10R, 1/10W, 1%, 0402"
R33: library part RES_0177, "Resistor, 90.9K, 1/20W, 1%, 0201"
R35 R36: library part RES_0169, "Resistor, 750K, 1/20W, 1%, 0201"
R37 R38: library part RES_0170, "Resistor, 130K, 1/20W, 1%, 0201"
R39 R41: library part RES_0067, "Resistor, 49.9K, 1/20W, 1%, 0201"
R40 R42: library part RES_0071, "Resistor, 62K, 1/20W, 1%, 0201"
S3: library part SWT_0006, "Switch, SPST-NO, Button, 4.6mm x 3.2mm"
TP1 TP2: library part MISC_0052, "Misc, TestPoint"
U1: library part IC_0201, "TVS DIODE 5VWM 15VC SLP2611N9T"
U2: library part IC_0196, "DisplayPort 1.4-to-Dual MIPI Output Converter"
U3: library part IC_0197, "IC MCU 32BIT 256KB FLASH 48QFN"
U4 U6: library part IC_0195, "IC REG BUCK ADJ 1.2A SYNC 8WSON"
U5: library part IC_0199, "IC REG BCK BST INV ADJ DL 24VQFN"
U7 U8: library part IC_0200, "IC LED DRIVER 20TSSOP"
U9: library part IC_0118, "3.3 V LDO Voltage Regulators 250mA Ultra-Lo Noise LDO Reg"
Y1: library part XTAL_0025, "Crystal, 24MHz, 6pF, 4-SMD (2x1.6)"
Y2: library part XTAL_0023, "Crystal, 32.768KHz, 12.5pF, 2-SMD(3.2x1.5)"
Y3: library part XTAL_0024, "Crystal, 16MHz, 10pF, 4-SMD (2x1.6)"

## Free pads (board coordinates)
  round 3.8 hole 2.2: 0(2.2,2.2) 0(68.7,24.9) 0(125.4,2.3)

## Via types
v1: diameter 0.3, hole 0.15, L1-TOP to L4-BOT, tented both sides, 445 vias
v2: diameter 0.25, hole 0.1, L1-TOP to L4-BOT, tented both sides, 2 vias

## Nets (pads, with @x,y where several pads share a name; then routed paths per layer and width w, separated by ;. In a path a pad name is that pad's centre, name@x,y a point inside that pad or via, vN(x,y) a via of type N, cw(c..) or ccw(c..) an arc to the next point about the centre after c; other vN are vias at no path point)
1V: C24.2 C25.2 FB1.1 R24.2 U2.F8 U2.G8 | length 35.5
  L1-TOP w0.152: U2.G8@68.5,8.675 68.6,8.775 v1(68.6,8.875) 68.6,8.975 U2.F8@68.5,9.075 U2.G8@68.5,8.675
  L1-TOP w0.3: v1(50.66,13.2) 51.06,12.8 v1(51.46,13.2) v1(51.06,13.2) v1(50.66,13.2)
  L1-TOP w0.5: R24.2@50.56,5.7 51.06,6.2 51.06,12.8 51.06,13
  L4-BOT w0.2: C24.2@68.46,7.45 68.54,7.53 C25.2@68.54,8.2 68.6,8.26 v1(68.6,8.875)
  L4-BOT w0.3: 51.6,13.3 51.5,13.2 v1(51.46,13.2) v1(51.06,13.2) v1(50.66,13.2) 50.6,13.26 50.6,13.3 61.5,13.3 65.76,9.04 65.76,7.24 66.7,6.3 FB1.1@67.305,6.3 ; FB1.1@67.205,6.4 FB1.1@67.305,6.3 ; C24.2@68.46,7.45 68.46,7.255 FB1.1@67.505,6.3 FB1.1@67.305,6.3
1V8: C10.2 C11.2 C12.2 C13.2 C22.2 C23.2 FB2.1 FB3.1 J2.1 J3.2 J3.4 J3.8 J4.2 J4.4 J4.8 Q1.5 R6.2 R7.2 R8.2 R9.2 R10.2 R12.2 R14.2 R22.2 R32.2 U2.D8 U2.E8 U3.17 U3.36 U3.44 | length 239.6
  L1-TOP w0.127: Q1.5@62.96,24.4 63.71,24.4 R22.2@63.86,24.55 64.41,24.55 66.66,22.3 69.2,22.3 70.72,20.78 v1(70.72,14.9)
  L1-TOP w0.152: U2.E8@68.5,9.475 68.6,9.575 v1(68.6,9.675) 68.6,9.775 U2.D8@68.5,9.875 U2.E8@68.5,9.475
  L1-TOP w0.2: J4.2@3.05,9.25 3.05,9.95 3.225,10.125 3.4,9.95 J4.4@3.4,9.25 ; 3.7,10.45 4.1,10.05 J4.8@4.1,9.25 ; 75,14.8 75,14.14 ; v1@75.16,14.8 75.71,14.8 R8.2@75.81,14.7 ; R10.2@75.41,13.7 75,14.11 75,14.14 ; R6.2@75.86,13.05 R7.2@75.16,13.05 74.71,13.05 74.66,13.1 ; v1(76.75,16.75) J2.1@77.66,16.75 ; U3.36@77.2,4.8 76.405,4.8 C13.2@76.3,4.695 76.195,4.8 75.96,4.8 75.035,5.725 75.035,10.625 74.66,11 74.66,13.1 ; R9.2@80.85,1.9 80.95,1.8 v1(82,1.8) ; U3.44@81.375,4.125 81.375,3.725 81.7,3.4 C11.2@81.7,3.03 ; U3.17@81.375,10.975 81.375,11.65 81.625,11.9 81.625,12.12 C12.2@81.655,12.15 ; C12.2@81.655,12.18 C12.2@81.655,12.15 ; C11.2@81.845,2.955 81.895,2.955 82.16,2.69 82.2,2.65 82.2,1.8 ; R12.2@82.575,12.15 81.795,12.15 81.725,12.22 C12.2@81.655,12.15 ; J3.2@116.25,8.75 116.25,8.075 116.375,7.95 116.6,7.95 J3.4@116.6,8.75 ; 117.11,7.95 117.3,8.14 J3.8@117.3,8.75 ; 74.66,13.1 74.66,13.8 75,14.14
  L1-TOP w0.3: v1(74.8,14.8) 74.96,14.8 75,14.8 v1@75.16,14.8 ; C12.2@81.755,12.15 v1(81.755,12.475) ; v1(82,1.8) 82.2,1.8 v1(82.4,1.8) ; R12.2@82.575,12.15 v1(82.575,12.475) ; v1(86.46,12.4) v1(86.86,12.4) v1(87.26,12.4) 87.26,10 88.11,9.15 C10.2@88.11,8.6 89.215,8.6 FB2.1@89.36,8.455 90.26,7.555 90.26,6.16 88.76,4.66 88.76,3.6 ; R14.2@89.46,3.55 88.81,3.55 88.76,3.6 ; 116.6,7.95 117.11,7.95 v1(117.56,7.5) v1(117.96,7.5) v1(118.36,7.5) ; 48.66,12.825 v1(49.06,13.225) v1(48.66,13.225) ; 48.66,12.825 v1(48.66,13.225) ; 48.66,12.825 v1(48.26,13.225) v1(48.66,13.225) ; 70.1,13.6 v1(69.9,13.6) v1(69.9,13.2) v1(70.3,13.6) ; 70.1,13.6 v1(70.3,13.6) ; 70.1,13.6 70.72,14.22 ; v1(70.3,13.6) 70.8,14.1 ; 70.72,14.22 70.72,14.18 70.8,14.1 ; 70.72,14.22 v1(70.72,14.9) ; 70.72,14.22 71.06,14.56 ; v1(70.72,14.9) v1(71.16,14.9) ; v1(70.72,14.9) 70.96,14.66 ; 70.8,14.1 71.16,14.46 ; 70.96,14.66 v1@71.16,14.86 ; 70.96,14.66 71.06,14.56 ; 71.06,14.56 71.16,14.66 ; 71.06,14.56 71.16,14.46 ; 71.16,14.46 v1(71.6,14.9) v1(71.16,14.9) ; 71.16,14.46 71.16,14.66 ; 71.16,14.66 v1@71.16,14.86 ; v1@71.16,14.86 v1(71.16,14.9) ; v1@83.9,1.9 83.5,1.9 v1(83.4,1.8) v1(83.8,1.8) v1@83.9,1.9 ; v1@83.9,1.9 88.56,1.9 88.76,2.1 88.76,3.6
  L1-TOP w0.4: 3.225,9.975 3.7,10.45 3.7,12.2 4.865,13.365 v1(18.5,13.365) v1(18.9,13.365) v1(19.3,13.365) v1(19.7,13.365)
  L1-TOP w0.5: R32.2@48.66,11.8 48.66,12.825
  L4-BOT w0.2: C22.2@68.46,10.95 68.54,10.87 C23.2@68.54,10.2 68.6,10.14 v1(68.6,9.675) ; 76.75,15.25 v1(76.75,16.75)
  L4-BOT w0.3: 48.12,13.365 v1(48.26,13.225) v1(48.66,13.225) v1(49.06,13.225) 49.2,13.365 ; C22.2@68.46,10.95 68.46,11.445 FB3.1@69.215,12.2 69.525,12.51 69.525,13.025 69.9,13.4 ; 70.42,15.2 v1(70.72,14.9) v1(71.16,14.9) v1(71.6,14.9) 71.9,15.2 ; 74.4,15.2 v1(74.8,14.8) ; 75.2,15.2 v1(74.8,14.8) ; 75.6,15.2 v1(75.2,14.8) v1(74.8,14.8) ; v1(82,1.8) v1(82.4,1.8) v1(83.4,1.8) v1(83.8,1.8) ; v1(86.46,12.4) v1(86.86,12.4) v1(87.26,12.4) ; v1(117.56,7.5) v1(117.96,7.5) v1(118.36,7.5) 118.7,7.5 119.225,6.975 119.225,5.775 119.7,5.3 121.6,5.3 122.3,4.6 ; 69.9,13.4 v1(69.9,13.2) v1(70.3,13.6) v1(69.9,13.6) 69.9,13.4
  L4-BOT w0.4: v1(18.5,13.365) 48.12,13.365 49.2,13.365 49.635,13.8 60.6,13.8 62,15.2 70.42,15.2 71.9,15.2 74.4,15.2 75.2,15.2 75.6,15.2 77.9,15.2 80.625,12.475 v1(82.575,12.475) 93.475,12.475 94.4,13.4 124,13.4 126.6,10.8 126.6,6.7 125.475,5.575 124.375,5.575 123.4,4.6 122.3,4.6
1V8_ANA: C14.2 C15.2 C16.2 C17.2 FB2.2 U3.4 U3.6 | length 9.3
  L1-TOP w0.2: U3.4@84.05,6.3 85.045,6.3 85.125,6.22 85.255,6.35 86.875,6.35 C16.2@87.025,6.5 ; U3.6@84.05,7.274 U3.6@84.05,7.3 84.6,7.3 84.75,7.45 85.82,7.45 C17.2@85.9,7.53 85.98,7.45 86.325,7.45 86.45,7.325 86.45,6.825 86.575,6.7 C16.2@87,6.7
  L1-TOP w0.3: C16.2@87.1,6.55 C14.2@88.1,6.55 ; C14.2@88.225,6.425 C14.2@88.1,6.55 ; FB2.2@89.36,6.745 89.165,6.55 C14.2@88.1,6.55
1V8_AVDD: C18.2 C19.2 FB3.2 U2.C5 U2.C6 U2.C7 U2.G3 U2.G4 U2.G5 | length 6.8
  L1-TOP w0.152: U2.G3@66.5,8.675 U2.G4@66.9,8.675 U2.G5@67.3,8.675 ; U2.C5@67.3,10.275 U2.C6@67.7,10.275 U2.C7@68.1,10.275
  L4-BOT w0.2: v1(67.1,8.675) 66.585,8.675 C18.2@66.56,8.7 66.66,8.8 66.66,10.425 66.915,10.68 C19.2@67.01,10.68 ; v1(67.5,10.275) 67.095,10.68 C19.2@67.01,10.68 ; FB3.2@67.505,12.2 67.505,12.105 67.01,11.61 C19.2@67.01,10.68
1V8_BUCK: C43.2 C44.2 L3.2 R32.1 R33.2 U6.5 | length 11.8
  L1-TOP w0.1: L3.2@46.625,11.2 46.625,10.635 46.96,10.3 L3.2@47.01,10.3
  L1-TOP w0.2: R33.2@48.86,7.65 50.01,7.65 50.36,8 50.36,9.5 C44.2@49.56,10.3
  L1-TOP w0.25: L3.2@46.525,11.2 46.525,11.165 L3.2@46.56,11.2 ; L3.2@46.625,11.2 47.01,10.815 47.01,10.3 U6.5@47.01,8.995
  L1-TOP w0.3: C44.2@49.56,10.3 C44.2@49.66,10.4
  L1-TOP w0.5: L3.2@47.11,10.4 C43.2@48.26,10.4 ; C43.2@48.26,10.3 C44.2@49.56,10.3 ; C44.2@49.66,10.4 R32.1@49.66,11.8
1V_AVDD: C20.2 C21.2 FB1.2 U2.D4 U2.E4 U2.G6 U2.G7 | length 7.5
  L1-TOP w0.152: U2.G6@67.7,8.675 U2.G7@68.1,8.675 ; U2.E4@66.9,9.475 67,9.575 v1(67,9.675) 67,9.775 U2.D4@66.9,9.875 U2.E4@66.9,9.475
  L4-BOT w0.2: v1(67,9.675) 67,9.26 67.36,8.9 68.06,8.9 68.46,9.3 69.06,9.3 C20.2@69.16,9.4
  L4-BOT w0.3: v1(67.9,8.675) 67.9,8.84 67.91,8.85 ; C20.2@69.16,9.4 69.18,9.38 C21.2@69.18,8.8 69.18,6.335 FB1.2@69.215,6.3
1V_BUCK: C31.2 C32.2 L2.2 R24.1 R25.2 U4.5 | length 10.7
  L1-TOP w0.2: C32.2@48.36,4.4 C32.2@48.46,4.3 ; R25.2@48.86,1.65 50.01,1.65 50.36,2 50.36,3.5 C31.2@49.56,4.3
  L1-TOP w0.25: L2.2@46.825,5.2 47.01,5.015 47.01,4.4 U4.5@47.01,2.995
  L1-TOP w0.5: L2.2@47.01,4.4 48.26,4.4 C32.2@48.26,4.3 48.46,4.3 C31.2@49.56,4.3 R24.1@49.56,5.7
3V3: R1.2 R16.2 R17.2 R23.1 | length 26.5
  L1-TOP w0.127: v1(60,19.84) R1.2@60.46,19.84
  L1-TOP w0.15: R23.1@60.46,24.55 59.81,24.55 59.56,24.3 58.06,24.3 57.46,23.7 57.46,17.14 58,16.6 59.6,16.6 v1(60,16.2) 60.5,15.7 R17.2@60.56,15.7 ; R17.2@60.5,15.9 R17.2@60.56,15.9
  L1-TOP w0.3: R16.2@54.225,11.89 58.09,11.89 60.56,14.36 R17.2@60.56,15.7
  L4-BOT w0.15: v1(60,16.2) v1(60,19.84)
5V: C5.1 C28.2 C33.2 C42.2 C45.2 C46.2 C47.2 C48.2 C57.2 C60.2 C61.2 C62.2 CON2.1 D1.A D6.A L1.1 L5.1 L6.1 R31.1 U4.1 U4.8 U5.5 U5.6 U6.1 U6.8 U7.1 U7.20 U8.1 U8.20 U9.1 U9.3 | length 182.1
  L1-TOP w0.2: 43.06,6.8 45.51,6.8 U6.1@45.51,7.005 ; 43.3,3.3 43.3,1.26 43.76,0.8 45.51,0.8 U4.1@45.51,1.005 ; C5.1@53.275,6.05 53.275,5.6 53.525,5.35 54.625,5.35 55.15,5.875 U9.3@55.15,7.1
  L1-TOP w0.25: U4.1@45.51,0.785 U4.1@45.51,0.8 ; U6.1@45.51,6.785 U6.1@45.51,6.8
  L1-TOP w0.3: 93.9,7.3 90.96,4.36 90.96,3.3 91.26,3 96.85,3 97.725,2.125 99.129,2.125 U7.1@99.129,2.365 U7.1@99.129,2.8
  L1-TOP w0.4: D1.A@91.075,11.925 91.175,12.025 D6.A@91.175,12.7 91.775,13.3 92.5,13.3
  L1-TOP w0.5: U8.20@23.718,6.516 23.718,7.155 L6.1@27.1,7.155 ; U8.1@23.825,12.4 C60.2@24.71,12.4 24.71,12.91 24.925,13.125 28.332,13.125 ; 28.46,12.997 28.332,13.125 ; 35.632,13.125 28.332,13.125 ; 35.691,12.927 R31.1@35.691,11.92 35.325,11.554 35.325,10.508 36.355,9.478 ; 37.578,12.915 37.66,12.997 ; L1.1@40.65,10.508 L1.1@40.868,10.29 ; 43.2,3.4 43.3,3.3 C28.2@44.36,3.3 44.56,3.1 45.36,3.1 ; 43.2,9.3 C42.2@44.36,9.3 44.56,9.1 45.36,9.1 ; 52.36,14 52.2,13.84 52.2,6.4 52.55,6.05 C5.1@53.275,6.05 53.25,6.05 U9.1@53.25,7.1 ; C45.2@95.28,7.28 C45.2@95.3,7.3 ; C46.2@97.35,7.3 99.129,7.3 U7.20@99.129,8.5 ; 40.647,12.997 40.65,12.997 40.65,13 40.647,12.997
  L1-TOP w0.75: L6.1@27.1,6.9 28.46,6.9 C48.2@28.46,9.4 C47.2@28.46,11.2 28.46,12.997 ; 35.76,12.997 37.66,12.997 43.2,12.997 ; C33.2@37.578,11.932 37.578,12.915 ; L1.1@40.65,10.508 40.65,12.997 ; 43.2,3.4 43.2,9.3 43.2,12.997 ; 58.9,14.6 58.3,14.6 57.2,13.5 54.26,13.5 53.76,14 52.36,14 47.9,14 46.897,12.997 43.2,12.997 ; 92.5,13.3 93.4,13.3 93.4,7.8 93.9,7.3 C45.2@95.3,7.3 ; C45.2@95.3,7.3 C46.2@97.35,7.3 97.35,9.7 L5.1@96.2,9.7 95.3,9.7 C45.2@95.3,7.3
  L1-TOP w1.2: C61.2@72.2,25.6 C62.2@74.4,25.6 CON2.1@76.99,25.6
  L4-BOT w0.75: 58.3,14.6 60.2,14.6 61.575,15.975 69.675,15.975 76.99,23.29 ; CON2.1@76.99,25.6 76.99,23.29 ; 93.1,13.3 80.9,13.3 80.025,14.175 80.025,20.255 76.99,23.29
  other v1: 92.4,13.1 92.8,13.1 93.2,13.1 92.4,13.5 92.8,13.5 93.2,13.5 58.2,14.4 58.6,14.4 59,14.4 58.2,14.8 58.6,14.8 59,14.8
5V7: J3.3 J4.3 R18.2 | length 132.2
  L1-TOP w0.2: J4.3@3.4,7.25 3.4,4.8 5,3.2 v1(5,1.4) ; J3.3@116.6,6.75 116.6,1.1 117,0.7 v1(117.3,0.7)
  L1-TOP w0.3: v1(5,1.4) v1(5.3,1.1) v1(5.6,0.8) ; 39.854,0.854 v1(39.5,0.5) v1(39.9,0.5) v1(40.3,0.5) 39.946,0.854 39.925,0.875 ; v1@39.925,0.516 39.925,0.7 39.925,0.875 ; 39.946,0.894 39.925,0.916 39.925,0.875 ; v1(117.3,0.7) v1(117.7,0.7) v1(118.1,0.7)
  L1-TOP w0.5: 39.925,0.7 39.946,0.721 39.946,0.854 39.946,0.894 R18.2@39.946,2.446
  L4-BOT w0.3: v1(5,1.4) v1(5.3,1.1) 5.9,0.5 117.1,0.5 v1(117.3,0.7) v1(117.7,0.7) v1(118.1,0.7)
36V_BL_L: C49.1 C51.2 C52.2 D4.K J3.41 R35.1 | length 42.1
  L1-TOP w0.2: 100.96,12.06 R35.1@100.96,10.65 101.74,10.65 C49.1@101.76,10.63 ; C51.2@106.56,12.6 C51.2@106.76,12.8 ; J3.41@123.25,6.75 123.25,6.01 123.96,5.3 126.26,5.3 127.3,6.34 127.3,11.26 127.18,11.38
  L1-TOP w0.5: D4.K@99.5,12.15 100.9,12.15 101.35,12.6 C52.2@104.26,12.6 C51.2@106.56,12.6 107,12.6 107.8,13.4 125.15,13.4 127.175,11.375
36V_BL_R: C50.1 C53.2 C54.2 D5.K J4.41 R36.1 | length 19.3
  L1-TOP w0.2: J4.41@10.05,7.25 10.05,6.95 11.2,5.8 12.1,5.8 12.2,5.7 ; C50.1@21.06,3.75 R36.1@21.86,3.75 21.86,2.15 21.9,2.15 ; D5.K@23.5,1.95 D5.K@23.5,2
  L1-TOP w0.5: 12.2,5.7 13.1,4.8 13.1,3.5 14.8,1.8 C54.2@16.16,1.8 C53.2@18.46,1.8 18.81,2.15 21.86,2.15 D5.K@23.5,2.15
-5V7: J3.7 J4.7 R19.2 | length 129.1
  L1-TOP w0.2: J4.7@4.1,7.25 4.1,4.8 5.5,3.4 v1(5.5,1.8) ; v1(117.3,1.3) J3.7@117.3,6.75
  L1-TOP w0.3: v1(5.5,1.8) v1(6.1,1.2) ; v1(117.3,1.3) v1(117.7,1.3) v1(118.1,1.3) ; v1(34.45,0.925) 34.45,1.1 R19.2@34.45,1.325 ; v1(34.45,0.925) v1(34.85,0.925) 34.454,1.321 34.454,1.329 R19.2@34.45,1.325 ; v1(34.45,0.925) v1(34.05,0.925) R19.2@34.45,1.325
  L1-TOP w0.5: 34.45,1.1 34.454,1.104 R19.2@34.454,1.321 ; R19.2@34.454,1.329 R19.2@34.454,1.646
  L4-BOT w0.3: v1(5.5,1.8) 6.375,0.925 116.625,0.925 117,1.3 v1(117.7,1.3) v1(118.1,1.3)
  other v1: 5.8,1.5
ANX_HPD: Q1.4 R22.1 U2.D9 | length 20.2
  L1-TOP w0.076: R22.1@63.86,23.85 64.65,23.85 66.5,22 69,22 70.2,20.8 70.2,14.6 69.5,13.9 69.5,12.04 68.7,11.24 68.7,10.075 U2.D9@68.9,9.875
  L1-TOP w0.152: Q1.4@62.96,23.9 63.81,23.9 R22.1@63.86,23.85
ANX_I2C_SCL: J2.9 R7.1 U2.D10 U3.32 | length 25.8
  L1-TOP w0.076: U2.D10@69.3,9.875 69.575,9.875 70.1,10.4 71.56,10.4 v1(72.56,11.4)
  L1-TOP w0.1: v1(72.56,11.4) 73.06,11.4 73.16,11.5 73.16,17.86 76.05,20.75 J2.9@77.66,20.75
  L1-TOP w0.125: R7.1@75.16,12.35 v1(75.16,11.4) 75.335,11.225 75.335,8.325 76.86,6.8 U3.32@77.2,6.8
  L4-BOT w0.125: v1(72.56,11.4) v1(75.16,11.4)
ANX_I2C_SDA: J2.11 R6.1 U2.C9 U3.31 | length 26.6
  L1-TOP w0.076: U2.C9@68.9,10.275 69.1,10.075 69.475,10.075 70,10.6 71.36,10.6 72.46,11.7 v1(72.86,11.7)
  L1-TOP w0.1: v1(72.86,11.7) 72.86,18.36 76.25,21.75 J2.11@77.66,21.75
  L1-TOP w0.125: R6.1@75.86,12.35 v1(75.86,11.7) 75.585,11.425 75.585,8.575 76.86,7.3 U3.31@77.2,7.3
  L4-BOT w0.127: v1(72.86,11.7) v1(75.86,11.7)
ANX_I2S_MCK: U2.B10 | length 0
ANX_I2S_SCK: U2.H8
ANX_I2S_SD: U2.E10
ANX_I2S_WS: U2.H7
ANX_INTP: J2.12 R8.1 U2.B4 U3.26 | length 30.1
  L1-TOP w0.076: v1(66.46,11.6) 66.7,11.36 66.7,10.875 U2.B4@66.9,10.675
  L1-TOP w0.1: R8.1@76.51,14.7 76.81,15 78.3,15 79.4,16.1 79.4,21.2 78.35,22.25 J2.12@77.66,22.25
  L1-TOP w0.127: R8.1@76.51,14.7 76.51,14.35 v1(76.76,14.1) 76.96,13.9 76.96,12.34 77.2,12.1 77.2,11.09 76.585,10.475 76.585,10.075 76.86,9.8 U3.26@77.2,9.8
  L4-BOT w0.127: v1(66.46,11.6) 66.46,13.3 67.26,14.1 v1(76.76,14.1)
ANX_MSDA: U2.A10 U3.28 | length 11.5
  L1-TOP w0.1: U2.A10@69.3,11.075 71.075,11.075 v1(72,12)
  L1-TOP w0.127: v1(76.4,11.2) 76.085,10.885 76.085,9.575 76.86,8.8 U3.28@77.2,8.8
  L4-BOT w0.127: v1(72,12) 72,11.36 72.26,11.1 75.7,11.1 75.8,11.2 v1(76.4,11.2)
ANX_PWEN: U2.B3 U3.25 | length 19
  L1-TOP w0.076: v1@66.06,11.54 v1(66.06,11.6) 66.3,11.36 66.3,10.875 U2.B3@66.5,10.675
  L1-TOP w0.127: v1(77.1,14.46) 77.26,14.3 77.26,12.44 77.46,12.24 77.46,10.3 U3.25@77.2,10.3
  L4-BOT w0.127: v1(66.06,11.6) 66.06,13.4 67.12,14.46 v1(77.1,14.46)
ANX_RESETN: U2.C10 U3.27 | length 11.6
  L1-TOP w0.076: U2.C10@69.3,10.275 69.825,10.8 71.26,10.8 72.46,12 v1(72.5,12)
  L1-TOP w0.127: v1(76.76,12) 76.76,10.975 76.335,10.55 76.335,9.825 76.86,9.3 U3.27@77.2,9.3
  L1-TOP w0.15: U3.27@77.175,9.325 U3.27@77.2,9.3
  L4-BOT w0.127: v1(72.5,12) v1(76.76,12)
ANX_XIN: C8.1 R20.1 U2.A2 Y1.1 | length 6.3
  L1-TOP w0.1: Y1.1@62.46,14.1 62.46,14.15 Y1.1@62.63,14.32 ; C8.1@62.67,15 62.67,14.32 Y1.1@62.5,14.15 63.15,13.5 63.9,13.5 64.3,13.1 R20.1@64.3,12.75 64.3,12.7 64.425,12.575 64.6,12.575 U2.A2@66.1,11.075
ANX_XOUT: C7.1 R20.2 U2.A1 Y1.3 | length 4
  L1-TOP w0.1: C7.1@63.29,12 63.29,12.68 63.46,12.85 Y1.3@63.56,12.75 ; Y1.3@63.475,12.825 R20.2@64.275,12.025 ; R20.2@64.3,12.05 64.725,12.05 U2.A1@65.7,11.075
AUX_N: C3.1 U2.D3 | length 9
  L1-TOP w0.076: C3.1@64.49,16.1 64.714,16.324 64.976,16.324 65.5,15.8 65.5,14.276 65.3,14.076 65.084,14.076 v1(64.96,14.2)
  L1-TOP w0.125: v2(66.35,10.025) U2.D3@66.5,9.875
  L4-BOT w0.076: v1(64.96,14.2) 65.084,14.076 65.399,14.076 65.612,13.863 65.612,11.163 65.86,10.916 65.86,10.101 66.06,9.901 66.226,9.901 v2(66.35,10.025)
AUX_P: C2.1 U2.E3 | length 9.5
  L1-TOP w0.076: C2.1@64.49,16.7 64.714,16.476 65.039,16.476 65.652,15.863 65.652,14.213 65.363,13.924 65.084,13.924 v1(64.96,13.8)
  L1-TOP w0.125: v2(66.35,9.625) U2.E3@66.5,9.475
  L4-BOT w0.076: v1(64.96,13.8) 65.084,13.924 65.336,13.924 65.46,13.8 65.46,11.1 65.708,10.852 65.708,10.038 65.997,9.749 66.226,9.749 v2(66.35,9.625)